# Altium PCB Hardware.PcbDoc
Units mm, origin at the board's own origin, x right, y up, seen from the top; angles counter-clockwise.
Board outline 91.31 x 138.68 mm, 2 copper layers (Top Layer, Bottom Layer); 27 components, 39 nets, 108 pads, 7 vias.
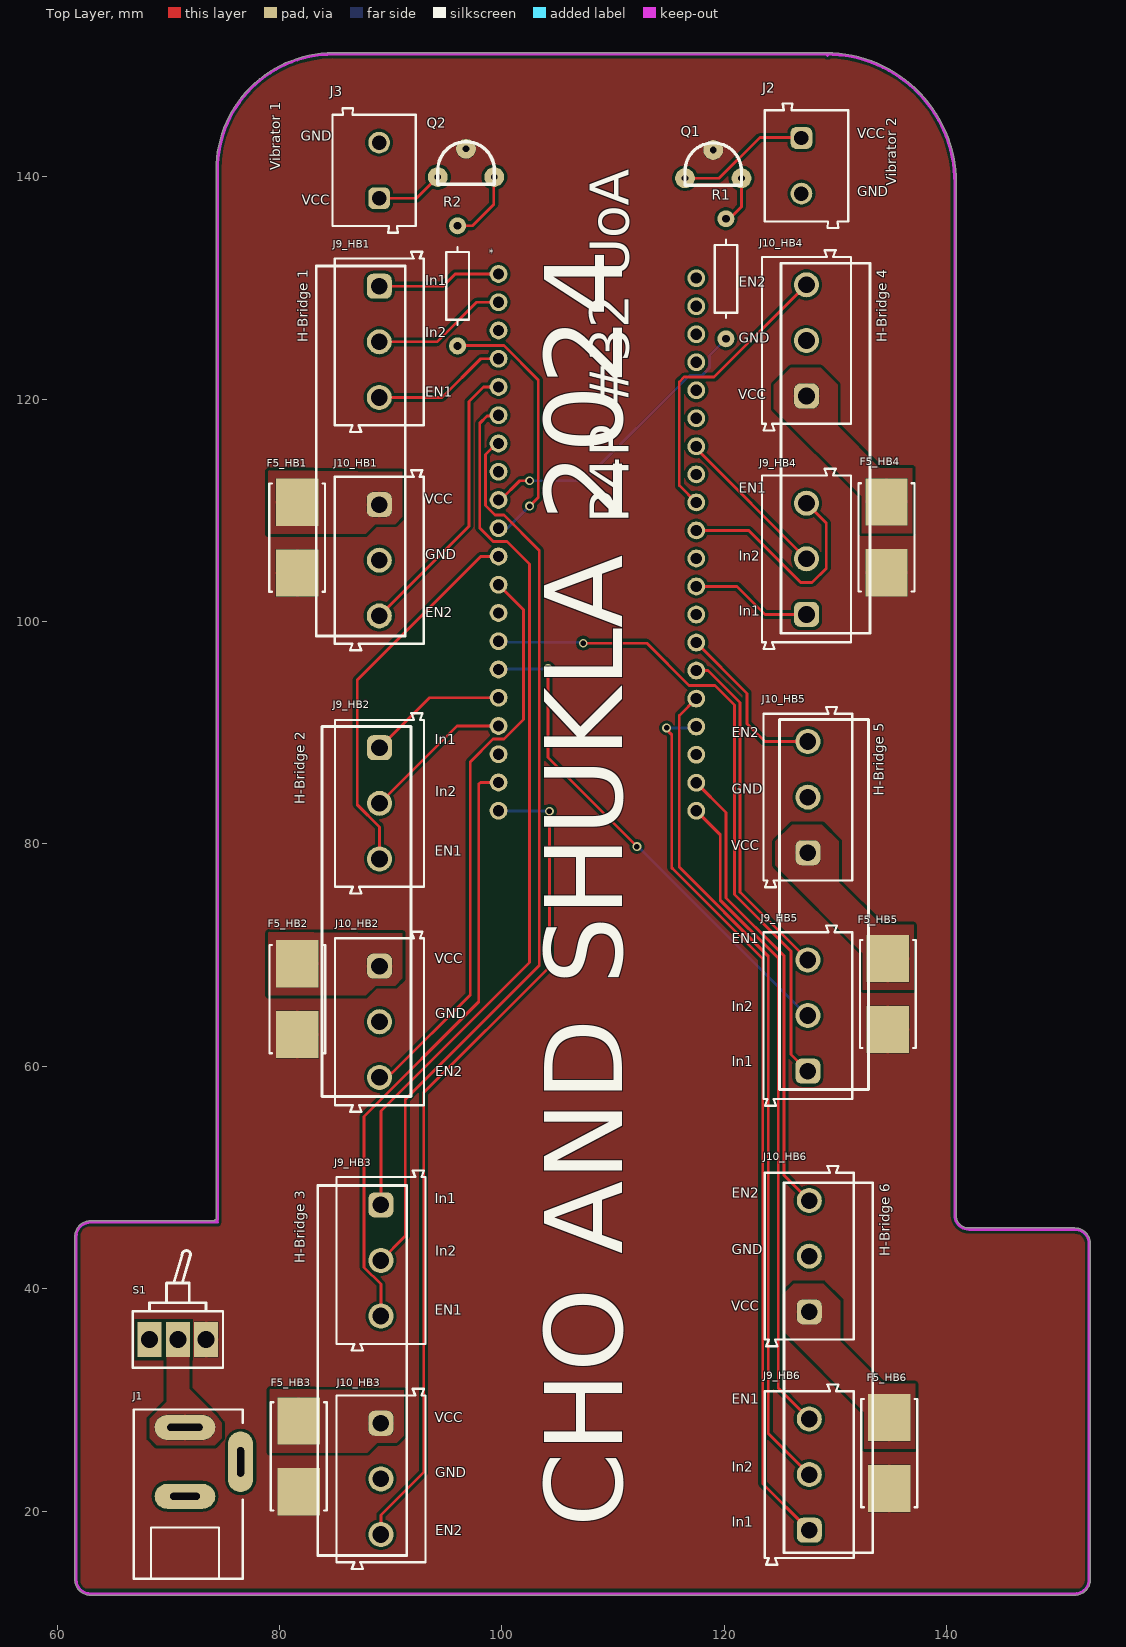
[diagram p0: Top Layer view]
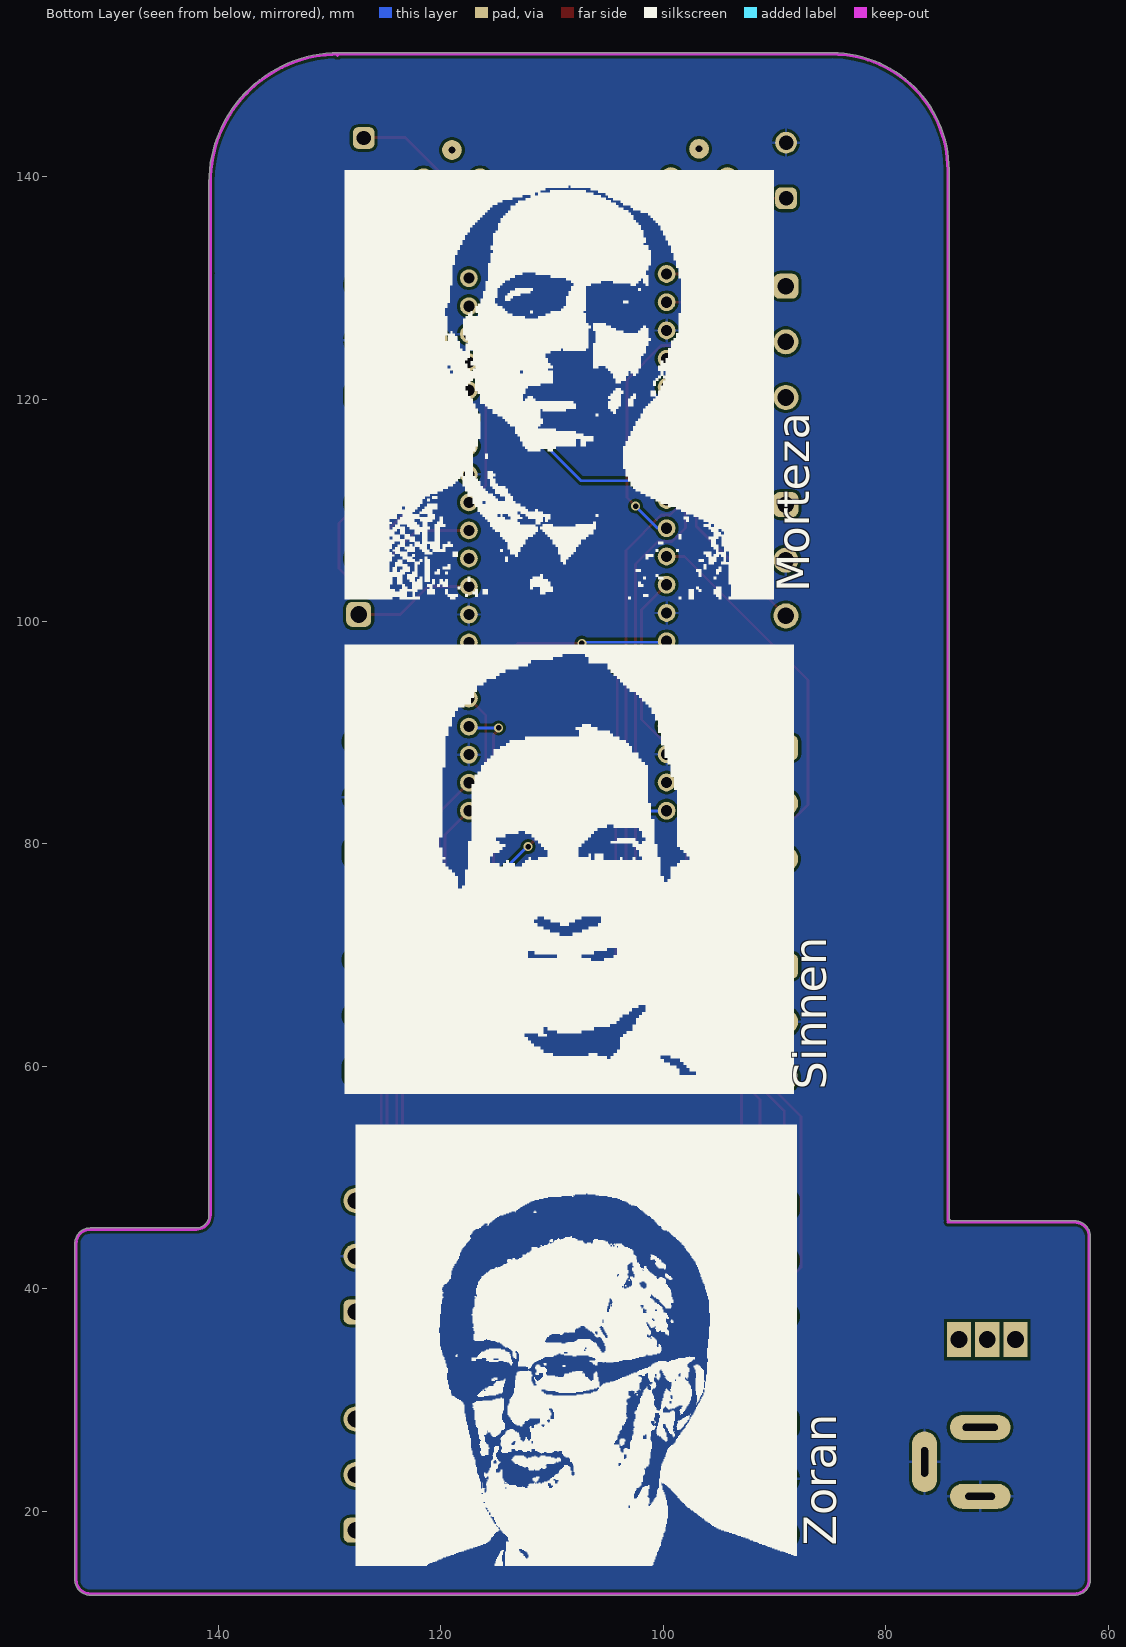
[diagram p1: Bottom Layer view, seen from below]
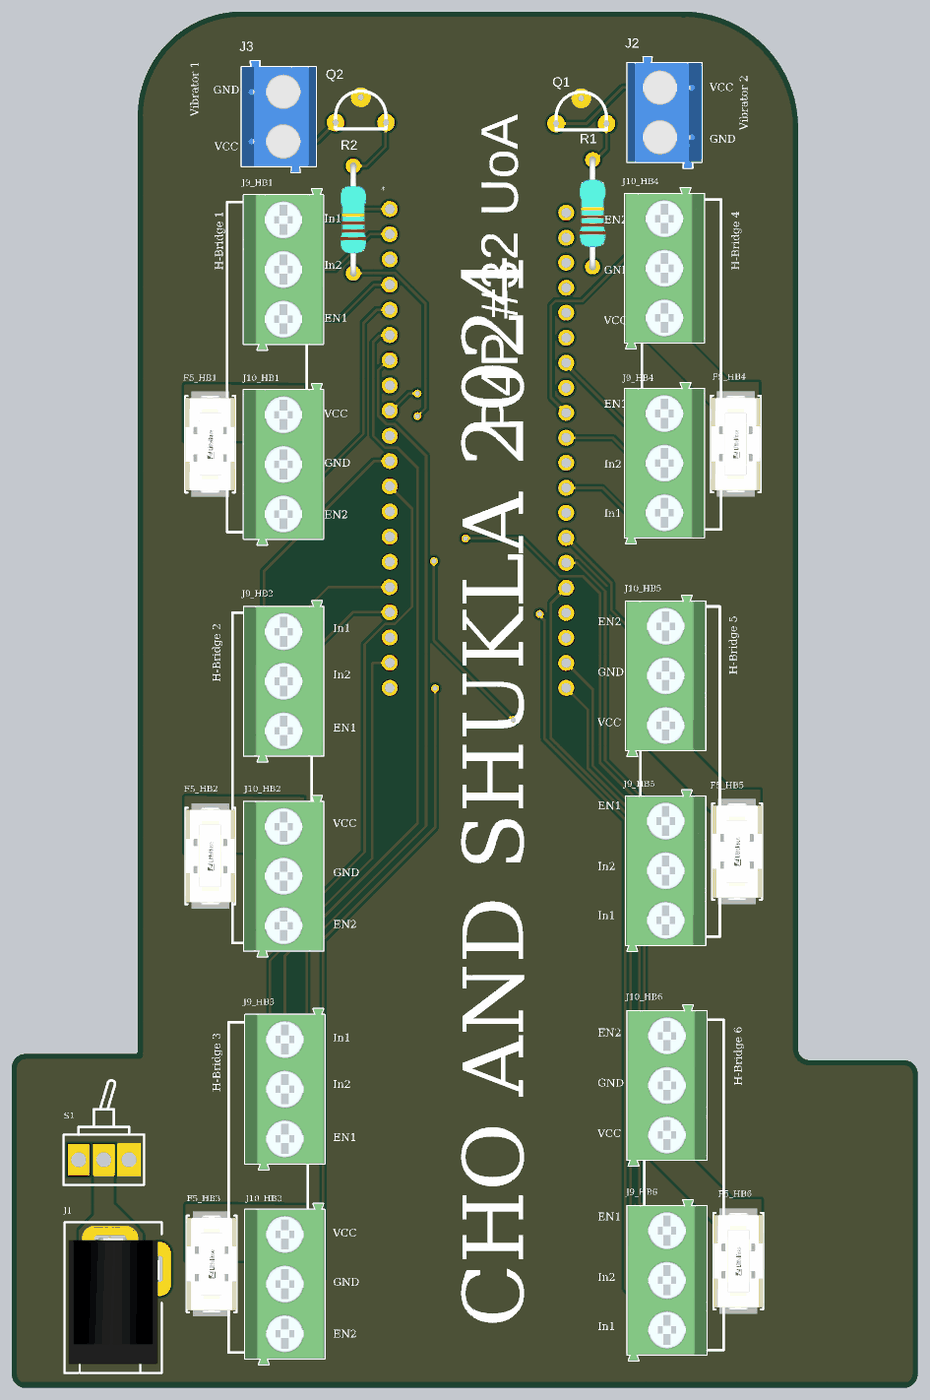
[diagram p2: 3D render of the assembled board from above, using the file's embedded part models]

## Layer stack, top to bottom
Top Solder: solder mask 0.0102, Solder Resist, Dk 3.5
Top Layer: signal copper 0.0356
Dielectric 1: dielectric 0.32, FR-4, Dk 4.8
Bottom Layer: signal copper 0.0356
Bottom Solder: solder mask 0.0102, Solder Resist, Dk 3.5

## Board outline
61.595,13.843 ccw(c62.992,13.843) 62.992,12.446 151.511,12.446 ccw(c151.511,13.843) 152.908,13.843 152.908,44.069 ccw(c151.511,44.069) 151.511,45.466 141.986,45.466 cw(c141.986,46.609) 140.843,46.609 140.843,128.397 140.843,131.325 140.843,131.328 140.843,139.446 ccw(c129.159,139.446) 129.159,151.13 84.836,151.13 ccw(c84.836,140.589) 74.295,140.589 74.295,128.524 74.295,46.228 ccw(c74.295,46.101) 74.168,46.101 62.992,46.101 ccw(c62.992,44.704) 61.595,44.704

## Design rules (kind name [scope] priority, off if disabled: settings)
Clearance [All] p1: gap=0.254 ignorepadtopadclearanceinfootprint=FALSE except(0: Arc-Hole Track-Hole SMDPad-Hole THPad-Hole Via-Hole Fill-Hole Poly-Hole Region-Hole Text-Hole)
PlaneConnect [InNet('VCC')] p1: planeconnectstyle=Direct reliefexpansion=0.508 reliefentries=4 reliefconductorwidth=0.254 reliefairgap=0.254
PolygonConnect [InNet('GND')] p1: connectstyle=Relief reliefconductorwidth=0.254 reliefentries=4 polygonreliefangle="90 Angle" airgapwidth=0.254
RoomDefinition HB3 [InComponentClass('HB3')] p1: confinementstyle=ConfineIn formatcopy=TRUE lockcomponents=FALSE outline 78.685,14.271 93.671,14.271 93.671,51.228 78.685,51.228
RoomDefinition HB4 [InComponentClass('HB4')] p2: confinementstyle=ConfineIn formatcopy=TRUE lockcomponents=FALSE outline 137.815,133.905 122.829,133.905 122.829,96.948 137.815,96.948
RoomDefinition HB1 [InComponentClass('HB1')] p3: confinementstyle=ConfineIn formatcopy=TRUE lockcomponents=FALSE outline 78.538,96.868 93.524,96.868 93.524,133.825 78.538,133.825
RoomDefinition HB6 [InComponentClass('HB6')] p4: confinementstyle=ConfineIn formatcopy=TRUE lockcomponents=FALSE outline 138.069,51.562 123.083,51.562 123.083,14.605 138.069,14.605
RoomDefinition HB5 [InComponentClass('HB5')] p5: confinementstyle=ConfineIn formatcopy=TRUE lockcomponents=FALSE outline 137.942,92.837 122.956,92.837 122.956,55.88 137.942,55.88
RoomDefinition HB2 [InComponentClass('HB2')] p6: confinementstyle=ConfineIn formatcopy=TRUE lockcomponents=FALSE outline 78.558,55.372 93.544,55.372 93.544,92.329 78.558,92.329
RoutingVias [All] p1: holewidth=0.711 width=1.27 viastyle="Through Hole" minholewidth=0.711 minwidth=1.27 maxholewidth=0.711 maxwidth=1.27
SolderMaskExpansion [All] p1: expansion=0.102 istentingtop=FALSE
Width [All] p1: maxlimit=0.254 minlimit=0.254 preferedwidth=0.254
29 further rules are at their usual default settings.

## Classes and differential pairs
channel class HBridgeInterface: HB1 HB2 HB3 HB4 HB5 HB6
component class HB6: F5_HB6 J9_HB6 J10_HB6
component class HB5: F5_HB5 J9_HB5 J10_HB5
component class HB4: F5_HB4 J9_HB4 J10_HB4
component class HB3: F5_HB3 J9_HB3 J10_HB3
component class HB2: F5_HB2 J9_HB2 J10_HB2
component class HB1: F5_HB1 J9_HB1 J10_HB1
component class HardwareSchematic: * J1 J2 J3 Q1 Q2 R1 R2 S1

## Components (designator, comment, footprint, x,y, rotation, side; value= is the part's Value field where it differs from the comment)
* "Pico Pi W" "New footprint 1" 99.695,131.242 r0 top
F5_HB1 "0154004.DR" FP-0154-MFG 81.586,107.536 r90 top (schematic designator F5)
F5_HB2 "0154004.DR" FP-0154-MFG 81.606,66.04 r90 top (schematic designator F5)
F5_HB3 "0154004.DR" FP-0154-MFG 81.733,24.939 r90 top (schematic designator F5)
F5_HB4 "0154004.DR" FP-0154-MFG 134.575,107.569 r90 top (schematic designator F5)
F5_HB5 "0154004.DR" FP-0154-MFG 134.702,66.501 r90 top (schematic designator F5)
F5_HB6 "0154004.DR" FP-0154-MFG 134.829,25.226 r90 top (schematic designator F5)
J1 "AC_Input" AC-Socket 71.501,21.536 r90 top value=socket
J2 "691102710002" 691102710002 127.381,140.97 r270 top
J3 "691102710002" 691102710002 88.506,140.549 r90 top
J9_HB1 "691111710003" 691111710003 88.972,125.142 r270 top (schematic designator J9)
J9_HB2 "691111710003" 691111710003 88.992,83.646 r270 top (schematic designator J9)
J9_HB3 "691111710003" 691111710003 89.119,42.545 r270 top (schematic designator J9)
J9_HB4 "691111710003" 691111710003 127.381,105.631 r90 top (schematic designator J9)
J9_HB5 "691111710003" 691111710003 127.508,64.563 r90 top (schematic designator J9)
J9_HB6 "691111710003" 691111710003 127.635,23.288 r90 top (schematic designator J9)
J10_HB1 "691111710003" 691111710003 88.972,105.504 r270 top (schematic designator J10)
J10_HB2 "691111710003" 691111710003 88.992,64.008 r270 top (schematic designator J10)
J10_HB3 "691111710003" 691111710003 89.119,22.907 r270 top (schematic designator J10)
J10_HB4 "691111710003" 691111710003 127.381,125.269 r90 top (schematic designator J10)
J10_HB5 "691111710003" 691111710003 127.508,84.201 r90 top (schematic designator J10)
J10_HB6 "691111710003" 691111710003 127.635,42.926 r90 top (schematic designator J10)
Q1 "BC639" TO-92R 121.539,139.977 r0 top
Q2 "BC639" TO-92R 99.314,140.081 r0 top
R1 "Res_TH_0AX4" AXIAL-0.4 120.142,130.81 r90 top
R2 "Res_TH_0AX4" AXIAL-0.4 96.012,130.175 r90 top
S1 "SW-SPDT" SW-SPDT 68.326,35.433 r0 top

## Footprints (in the part's own frame and the unit in brackets; to place one, negate y for a bottom-side part, rotate by r counter-clockwise, add the part's x,y. Pads: shape width x height; smd on the part's side, far side on the other; paste and mask are expansions set on the pad)
691102710002 [mm] "5,00mm - modular - blue - Horizontal entry with pressure clamp - 9,9 mm height - 02p"
  rrect50% 1.95x1.95 hole 1.3: 1(-2.5,-0.45)
  round 1.95 hole 1.3: 2(2.5,-0.45)
  silkscreen extent -5.6,-3.75 5.6,3.75, body extent -5.6,-3.75 5.6,3.75, height 9.96
691111710003 [mm] "5,00mm - modular - green - Horizontal entry with pressure clamp - 10,0mm height - 03p"
  rrect50% 2.25x2.25 hole 1.5: 1(-5,0)
  round 2.25 hole 1.5: 2(0,0) 3(5,0)
  silkscreen extent -8.1,-4 8.1,4, body extent -8.1,-4 8.1,4, height 11.05
AC-Socket [mm]
  oval 2.25x5.45 hole 0.635 slot 3.175 at 90 deg: 1(6,0)
  oval 5.45x2.25 hole 0.635 slot 2.667 at 0 deg: 2(2.9,-5)
  oval 2.25x5.45 hole 0.635 slot 2.667 at 90 deg: 3(-0.2,0)
  silkscreen extent -7.6,-5.2 7.6,4.6, body extent -6.7,-5 6,4.2, height 10.5
AXIAL-0.4 [mm]
  round 1.524 hole 0.7: 1(-5.4,0) 2(5.4,0)
  silkscreen extent -3.5,-1.02 3.5,1.02, body extent -5.7,-1.3 5.7,1.3, height 2.7
FP-0154-MFG [mm]
  rect 4.24x3.81 smd paste+0 mask+0: 1(-3.185,0) 2(3.185,0)
  silkscreen extent -4.86,-2.51 4.86,2.51, body extent -5.41,-2.62 5.41,2.62, height 0.25
"New footprint 1" [mm]
  round 1.6 hole 1: 1(0,0) 2(0,-2.54) 3(0,-5.08) 4(0,-7.62) 5(0,-10.16) 6(0,-12.7) 7(0,-15.24) 8(0,-17.78) 9(0,-20.32) 10(0,-22.86) 11(0,-25.4) 12(0,-27.94) 13(0,-30.48) 14(0,-33.02) 15(0,-35.56) 16(0,-38.1) 17(0,-40.64) 18(0,-43.18) 19(0,-45.72) 20(0,-48.26) 21(17.78,-48.26) 22(17.78,-45.74) 23(17.78,-43.22) 24(17.78,-40.699) 25(17.78,-38.179) 26(17.78,-35.659) 27(17.78,-33.139) 28(17.78,-30.619) 29(17.78,-28.098) 30(17.78,-25.578) 31(17.78,-23.058) 32(17.78,-20.538) 33(17.78,-18.017) 34(17.78,-15.497) 35(17.78,-12.977) 36(17.78,-10.457) 37(17.78,-7.937) 38(17.78,-5.416) 39(17.78,-2.896) 40(17.78,-0.376)
SW-SPDT [mil]
  rect 85x125 hole 60: 1(0,0) 2(100,0) 3(200,0)
  silkscreen extent -60,-100 260,315
TO-92R [mil]
  round 70 hole 24: 1(0,-5) 2(-100,95) 3(-200,-5)
  silkscreen extent -200,-30 0,120

## Part data
*: library part Pico-Pi-W-1, "micro"
F5_HB1 F5_HB2 F5_HB3 F5_HB4 F5_HB5 F5_HB6: library part CMP-08605-000003-1, "FUSE BRD MNT 4A 125VAC/VDC 2SMD", Fuse Current=4A, Manufacturer=Littelfuse, Max Fuse Ac Voltage=125V, Package=0154, Temperature="-55°C to +125°C", Temperature Range High=+125°C, Temperature Range Low=-55°C, Automotive=No, Category=Fuse, ComponentLink2Description=Datasheet, ComponentLink2URL=https://www.littelfuse.com/~/media/electronics/datasheets/fuses/littelfuse_fuse_154_154t_154l_154tl_datasheet.pdf.pdf, Device Class L1="Circuit Protection", Device Class L2=Fuses, Device Class L3=unset, Digikey Description="FUSE BRD MNT 4A 125VAC/VDC 2SMD", Fuse Blow Speed=Fast, Height=3.81mm, Lead Free=Yes, Manufacturer Part Number=0154004.DR, Max Fuse Dc Voltage=125V, Mouser Description="Surface Mount Fuses Fuseblock w/ fuse 4A OMNI BLOK 154", Octopart=https://octopart.com/0154004.dr-littelfuse-565861, RoHS=TRUE
J1: library part CMP-007-000005-1, "DC barrel jack connection to AC source", Component Type=Standard, Design Item ID=AC_Input, Pin Count=3, Source=EE209_SchLib.SchLib
J2 J3: library part CMP-1502-03258-2, Color=Blue, Current=15A, Max Operating Temperature=105°C, Min Operating Temperature=-40°C, Voltage=300V, Contact Material=Brass, Contact Plating=Tin, Current Rating=15A, Height=13.4mm, Housing Material=Nylon, Lead Pitch=5mm, Length=7.5mm, Mount="Through Hole", NexarPartId=8917706, Number of Contacts=2, Number of Levels=1, Number of Pins=2, Number of Positions Per Level=2, Packaging=Box, Pitch=5.0038mm, Plating=Steel, REACH SVHC=Unknown, RoHS=Compliant, Stripping Length=-6mm, Termination=Screw, Voltage Rating=300V, Width=11.2mm, Wire Gauge (Max)=22AWG, Wire Gauge (Min)=14AWG, Wire/Cable Gauge=22AWG
J9_HB1 J9_HB2 J9_HB3 J9_HB4 J9_HB5 J9_HB6 J10_HB1 J10_HB2 J10_HB3 J10_HB4 J10_HB5 J10_HB6: library part CMP-1502-03263-2, Color=Green, Current=8A, Max Operating Temperature=105°C, Min Operating Temperature=-40°C, Voltage=300V, Contact Material=Brass, Contact Plating=Tin, Current Rating=8A, Height=14mm, Housing Material=Nylon, Lead Pitch=5mm, Length=7.6mm, Mount="Through Hole", NexarPartId=8917709, Number of Contacts=3, Number of Levels=1, Number of Pins=3, Number of Positions Per Level=3, Packaging=Box, Pitch=5.0038mm, Plating=Steel, REACH SVHC=Unknown, RoHS=Compliant, Stripping Length=-6mm, Termination=Screw, Voltage Rating=300V, Width=16.2mm, Wire Gauge (Max)=26AWG, Wire Gauge (Min)=14AWG, Wire/Cable Gauge=26AWG
Q1 Q2: library part CMP-026-000003-1, "High Current Transistor NPN Silicon", PackageDocument=1996, Component Type=Standard, ComponentLink1Description="Manufacturer Link", ComponentLink1URL=http://www.motorola.com/, DatasheetDocument=Nov-1999, Design Item ID=BC639, LatestRevisionDate=17-Jul-2002, LatestRevisionNote="Re-released for DXP Platform.", PackageReference=29-04, Pin Count=3, Published=29-Sep-2000, Publisher="Altium Limited", Source=COMSYS301.SCHLIB
R1 R2: library part CMP-019-000001-1, "Through hole resistor", Component Type=Standard, Design Item ID=Res_TH_0AX4, LatestRevisionDate=17-Jul-2002, LatestRevisionNote="Re-released for DXP Platform.", PackageReference=AXIAL-0.4, Pin Count=2, Published=8-Jun-2000, Publisher="Altium Limited", Source=EE209_SchLib.SchLib
S1: library part CMP-025-000001-1, "Toggle Switch", Component Type=Standard, Design Item ID=SW-SPDT, Pin Count=3, Source=COMSYS301.SCHLIB

## Via types
v1: diameter 0.8, hole 0.5, Top Layer to Bottom Layer, 7 vias

## Nets (pads, with @x,y where several pads share a name; then routed paths per layer and width w, separated by ;. In a path a pad name is that pad's centre, name@x,y a point inside that pad or via, vN(x,y) a via of type N, cw(c..) or ccw(c..) an arc to the next point about the centre after c; other vN are vias at no path point)
GND: *.3 *.8 *.13 *.18 *.23 *.28 *.33 *.38 J1.2 J1.3 J2.2 J3.2 J10_HB1.2 J10_HB2.2 J10_HB3.2 J10_HB4.2 J10_HB5.2 J10_HB6.2
GP0: *.1 J9_HB1.1 | length 11.2
  Top Layer w0.254: J9_HB1.1 94.709,130.142 95.809,131.242 *.1
GP1: *.2 J9_HB1.2 | length 12.2
  Top Layer w0.254: J9_HB1.2 94.154,125.142 97.714,128.702 *.2
GP2: *.4 J9_HB1.3 | length 12.2
  Top Layer w0.254: J9_HB1.3 94.615,120.142 98.095,123.622 *.4
GP3: *.5 J10_HB1.3 | length 25.8
  Top Layer w0.254: J10_HB1.3 97.028,108.56 97.028,119.761 98.349,121.082 *.5
GP4: *.6 J9_HB3.1 | length 80.4
  Top Layer w0.254: J9_HB3.1 89.119,55.972 102.489,69.342 102.489,105.156 100.457,107.188 99.219,107.188 98.006,108.401 98.006,117.818 98.663,118.475 99.628,118.475 *.6
GP5: *.7 J9_HB3.2 | length 82.4
  Top Layer w0.254: J9_HB3.2 91.313,44.739 91.313,57.023 103.359,69.069 103.359,106.388 100.184,109.563 99.384,109.563 98.514,110.433 98.514,115.024 99.492,116.002 *.7
GP6: *.9 R1.1 | length 27.1
  Top Layer w0.254: *.9 99.873,110.922 101.6,112.649 v1(102.489,112.649)
  Bottom Layer w0.254: v1(102.489,112.649) 107.381,112.649 116.856,122.124 117.964,122.124 118.656,122.816 118.656,123.924 R1.1
GP7: *.10 R2.1 | length 23.7
  Top Layer w0.254: R2.1@96.128,124.764 96.63,124.764 96.669,124.803 100.184,124.803 103.27,121.717 103.27,111.144 v1(102.489,110.363)
  Bottom Layer w0.254: *.10 100.508,108.382 v1(102.489,110.363)
GP8: *.11 J9_HB2.3 | length 34.2
  Top Layer w0.254: J9_HB2.3 88.992,81.516 86.995,83.513 86.995,94.742 98.095,105.842 *.11
GP9: *.12 J10_HB2.3 | length 51.6
  Top Layer w0.254: J10_HB2.3 89.374,59.39 90.124,59.39 97.155,66.421 97.155,87.376 99.2,89.421 100.184,89.421 101.949,91.186 101.949,101.048 *.12
GP10: *.14 J9_HB5.1 | length 59.3
  Top Layer w0.254: v1(107.315,98.044) 113.03,98.044 116.83,94.244 119.16,94.244 120.904,92.5 120.904,75.449 126.002,70.351 126.002,61.069 J9_HB5.1
  Bottom Layer w0.254: *.14 99.784,98.133 107.226,98.133 v1(107.315,98.044)
GP11: *.15 J9_HB5.2 | length 45.4
  Top Layer w0.254: v1(104.14,95.758) 104.14,87.757 v1(112.141,79.756)
  Bottom Layer w0.254: *.15 99.733,95.72 104.102,95.72 v1(104.14,95.758) ; v1(112.141,79.756) 112.228,79.756 127.421,64.563 J9_HB5.2@127.461,64.563
GP12: *.16 J9_HB2.1 | length 12.6
  Top Layer w0.254: J9_HB2.1 93.488,93.142 *.16
GP13: *.17 J9_HB2.2 | length 16.7
  Top Layer w0.254: 91.186,85.84 J9_HB2.2 95.948,90.602 *.17
GP14: *.19 J9_HB3.3 | length 54.6
  Top Layer w0.254: J9_HB3.3 89.119,40.415 87.613,41.921 87.613,55.499 97.917,65.803 97.917,85.373 98.066,85.522 *.19
GP15: *.20 J10_HB3.3 | length 75.9
  Top Layer w0.254: J10_HB3.3 89.119,19.65 92.964,23.495 92.964,57.618 104.267,68.921 v1(104.267,82.931)
  Bottom Layer w0.254: *.20 99.721,82.957 104.241,82.957 v1(104.267,82.931)
GP16: *.21 J9_HB6.3 | length 58.9
  Top Layer w0.254: *.21 119.634,80.823 119.634,74.934 124.841,69.727 124.841,31.082 J9_HB6.3
GP17: *.22 J10_HB6.3 | length 41.8
  Top Layer w0.254: *.22 120.142,82.835 120.142,75.144 125.349,69.937 125.349,50.212 J10_HB6.3
GP18: *.24 J9_HB6.1 | length 80.2
  Top Layer w0.254: v1(114.808,90.424) 114.808,90.276 115.272,89.813 115.272,77.859 115.517,77.613 123.444,69.687 123.444,22.479 J9_HB6.1
  Bottom Layer w0.254: v1(114.808,90.424) 117.356,90.424 *.24
GP19: *.25 J9_HB6.2 | length 75.2
  Top Layer w0.254: *.25 117.469,93.063 115.951,91.545 115.951,77.898 123.952,69.897 123.952,26.971 J9_HB6.2
GP20: *.26 J9_HB5.3 | length 30.8
  Top Layer w0.254: *.26 118.539,95.583 121.412,92.71 121.412,75.659 J9_HB5.3
GP21: *.27 J10_HB5.3 | length 15.3
  Top Layer w0.254: *.27 122.047,93.531 122.047,90.805 123.651,89.201 J10_HB5.3
GP22: *.29 J9_HB4.1 | length 10.9
  Top Layer w0.254: *.29 121.138,103.144 123.651,100.631 J9_HB4.1
GP26: *.31 J9_HB4.3 | length 20.7
  Top Layer w0.254: *.31 122.194,108.184 126.873,103.505 127.889,103.505 129.159,104.775 129.159,108.853 J9_HB4.3
GP27: *.32 J10_HB4.3 | length 26.5
  Top Layer w0.254: *.32 115.951,112.228 115.951,121.539 116.378,121.966 119.078,121.966 J10_HB4.3
GP28: *.34 J9_HB4.2 | length 14.2
  Top Layer w0.254: *.34 117.475,115.537 J9_HB4.2
NetF5_HB1_2: F5_HB1.2 J10_HB1.1
NetF5_HB2_2: F5_HB2.2 J10_HB2.1
NetF5_HB3_2: F5_HB3.2 J10_HB3.1
NetF5_HB4_2: F5_HB4.2 J10_HB4.1
NetF5_HB5_2: F5_HB5.2 J10_HB5.1
NetF5_HB6_2: F5_HB6.2 J10_HB6.1
NetJ1_1: J1.1 S1.2
NetJ2_1: J2.1 Q1.3 | length 12
  Top Layer w0.254: Q1.3 119.53,139.85 123.19,143.51 126.891,143.51 J2.1
NetJ3_1: J3.1 Q2.3 | length 6.1
  Top Layer w0.254: J3.1 92.329,138.049 Q2.3
NetQ1_1: Q1.1 R1.2 | length 4.4
  Top Layer w0.254: R1.2 120.462,136.21 121.539,137.287 Q1.1
NetQ2_1: Q2.1 R2.2 | length 6.5
  Top Layer w0.254: R2.2 97.348,135.575 99.27,137.497 99.27,139.91 Q2.1
VCC: F5_HB1.1 F5_HB2.1 F5_HB3.1 F5_HB4.1 F5_HB5.1 F5_HB6.1 Q1.2 Q2.2 S1.3
pads on no net: *.30 *.35 *.36 *.37 *.39 *.40 S1.1

## Polygon pours and split planes (outlines as drawn)
NetF5_HB3_2 on Top Layer "NETF5_HB3_2_L01_P000" (solid, pour order 0): 79.121,30.988 79.121,25.273 79.248,25.273 79.375,25.273 87.884,25.273 88.773,26.162 90.551,26.162 91.186,26.797 91.186,30.861
NetF5_HB1_2 on Top Layer "NETF5_HB1_2_L01_P000" (solid, pour order 0): 78.974,113.585 78.974,107.87 79.101,107.87 79.228,107.87 87.737,107.87 88.626,108.759 90.404,108.759 91.039,109.394 91.039,113.458
NetF5_HB2_2 on Top Layer "NETF5_HB2_2_L01_P000" (solid, pour order 0): 78.994,72.089 78.994,66.374 79.121,66.374 79.248,66.374 87.757,66.374 88.646,67.263 90.424,67.263 91.059,67.898 91.059,71.962
NetJ1_1 on Top Layer "NETJ1_1_L01_P004" (solid, pour order 4): 69.85,37.338 69.85,29.845 68.326,28.321 68.326,26.543 68.961,25.908 74.168,25.908 74.803,26.543 74.803,27.94 74.295,28.575 71.882,30.988 71.882,37.338
NetF5_HB6_2 on Top Layer "NETF5_HB6_2_L01_P009" (solid, pour order 9): 124.714,38.942 126.238,40.466 128.905,40.466 130.429,38.942 130.429,35.259 134.239,31.449 137.16,31.449 137.16,25.607 132.588,25.607 132.588,28.909 124.714,36.783
NetF5_HB5_2 on Top Layer "NETF5_HB5_2_L01_P000" (solid, pour order 0): 124.587,80.217 126.111,81.741 128.778,81.741 130.302,80.217 130.302,76.534 134.112,72.724 137.033,72.724 137.033,66.882 132.461,66.882 132.461,70.184 124.587,78.058
NetF5_HB4_2 on Top Layer "NETF5_HB4_2_L01_P000" (solid, pour order 0): 124.46,121.285 125.984,122.809 128.651,122.809 130.175,121.285 130.175,117.602 133.985,113.792 136.906,113.792 136.906,107.95 132.334,107.95 132.334,111.252 124.46,119.126
VCC on Top Layer "VCC_L01_P010" (solid, remove dead copper, pour order 10): 56.769,151.638 56.769,13.081 152.781,13.081 152.781,151.638
GND on Bottom Layer "GND_L02_P001" (solid, remove dead copper, pour order 1): 49.53,155.511 49.53,10.668 55.245,4.953 56.261,5.969 168.021,5.969 168.021,139.573 152.196,155.398

## Keep-outs
Keep-Out Layer:
  lines w0.254: 74.295,46.101 ccw(c74.295,46.228) 74.422,46.228 74.422,128.524 74.422,140.589 cw(c84.836,140.589) 84.836,151.003 129.159,151.003 ; 74.422,45.974 64.008,45.974 62.992,45.974 ccw(c62.992,44.704) 61.722,44.704 61.722,13.843 ccw(c62.992,13.843) 62.992,12.573 64.516,12.573 151.511,12.573 ccw(c151.511,13.843) 152.781,13.843 152.781,44.069 ccw(c151.511,44.069) 151.511,45.339 141.986,45.339 cw(c141.986,46.609) 140.716,46.609 140.716,128.397 140.716,139.446 ccw(c129.159,139.446) 129.159,151.003 ; 129.286,150.876 ccw(c129.159,150.876) 129.159,151.003 ; 74.422,131.191 ccw(c74.422,131.191) 74.422,131.191 ; 140.716,131.326 ccw(c140.716,131.326) 140.716,131.326

## Silkscreen, mask and mechanical layers (free items; w line width, h text height)
Top Overlay:
  lines w0.254: 83.312,98.679 91.313,98.679 91.313,131.953 83.312,131.953 83.312,98.679 ; 83.439,16.002 91.44,16.002 91.44,49.276 83.439,49.276 83.439,16.002 ; 83.82,57.277 91.821,57.277 91.821,90.551 83.82,90.551 83.82,57.277 ; 124.968,57.912 132.969,57.912 132.969,91.186 124.968,91.186 124.968,57.912 ; 125.095,98.933 133.096,98.933 133.096,132.207 125.095,132.207 125.095,98.933 ; 125.349,16.256 133.35,16.256 133.35,49.53 125.349,49.53 125.349,16.256
  text "VCC" at 131.931,143.14 h1.52
  text "GND" at 81.893,142.886 h1.52
  text "Vibrator 1" at 80.38,140.589 h1.52 r90
  text "Vibrator 2" at 135.752,139.192 h1.52 r90
  text "GND" at 131.931,137.933 h1.52
  text "VCC" at 82.02,137.171 h1.52
  text "In1" at 93.091,129.921 h1.52
  text "EN2" at 121.29,129.794 h1.52
  text "In2" at 93.099,125.222 h1.52
  text "H-Bridge 1" at 82.851,125.096 h1.52 r90
  text "H-Bridge 4" at 134.921,125.096 h1.52 r90
  text "GND" at 121.291,124.725 h1.52
  text "EN1" at 93.088,119.888 h1.52
  text "VCC" at 121.263,119.645 h1.52
  text "EN1" at 121.282,111.252 h1.52
  text "VCC" at 93.069,110.247 h1.52
  text "P4P #32 UoA" at 112.582,108.839 h6 r90
  text "GND" at 93.097,105.294 h1.52
  text "In2" at 121.293,105.156 h1.52
  text "In1" at 121.285,100.203 h1.52
  text "EN2" at 93.096,100.076 h1.52
  text "EN2" at 120.655,89.281 h1.52
  text "In1" at 93.98,88.646 h1.52
  text "H-Bridge 5" at 134.667,84.329 h1.52 r90
  text "GND" at 120.656,84.212 h1.52
  text "In2" at 93.988,83.947 h1.52
  text "H-Bridge 2" at 82.597,83.567 h1.52 r90
  text "VCC" at 120.628,79.132 h1.52
  text "EN1" at 93.977,78.613 h1.52
  text "EN1" at 120.647,70.739 h1.52
  text "VCC" at 93.958,68.972 h1.52
  text "In2" at 120.658,64.643 h1.52
  text "GND" at 93.986,64.019 h1.52
  text "In1" at 120.65,59.69 h1.52
  text "EN2" at 93.985,58.801 h1.52
  text "EN2" at 120.655,47.879 h1.52
  text "In1" at 93.98,47.371 h1.52
  text "H-Bridge 6" at 135.175,42.927 h1.52 r90
  text "GND" at 120.656,42.81 h1.52
  text "In2" at 93.988,42.672 h1.52
  text "H-Bridge 3" at 82.597,42.292 h1.52 r90
  text "VCC" at 120.628,37.73 h1.52
  text "EN1" at 93.977,37.338 h1.52
  text "EN1" at 120.647,29.337 h1.52
  text "VCC" at 93.958,27.697 h1.52
  text "In2" at 120.658,23.241 h1.52
  text "GND" at 93.986,22.744 h1.52
  text "CHO AND SHUKLA 2024" at 113.124,18.542 h12 r90
  text "In1" at 120.65,18.288 h1.52
  text "EN2" at 93.985,17.526 h1.52
Bottom Overlay:
  drawing of 91 lines, arcs and shapes, not listed
  text "Morteza" at 85.888,102.616 h5 r270
  text "Sinnen" at 84.364,57.912 h5 r270
  text "Zoran" at 83.475,16.894 h5 r270
Mechanical 13:
  lines w0.254: 61.468,13.716 ccw(c62.738,13.716) 62.738,12.446 151.638,12.446 ccw(c151.638,13.716) 152.908,13.716 152.908,44.069 ccw(c151.638,44.069) 151.638,45.339 142.113,45.339 cw(c142.113,46.609) 140.843,46.609 140.843,139.436 ccw(c129.149,139.436) 129.149,151.13 84.734,151.13 ccw(c84.734,140.818) 74.422,140.818 74.422,47.371 cw(c73.152,47.371) 73.152,46.101 62.738,46.101 ccw(c62.738,44.831) 61.468,44.831 61.468,13.716